# Altium PCB STM32G041.PcbDoc
Units mil, origin at the board's own origin, x right, y up, seen from the top; angles counter-clockwise.
Board outline 2480.31 x 1732.28 mil, 2 copper layers (Top Layer, Bottom Layer); 54 components, 40 nets, 147 pads, 3 vias.
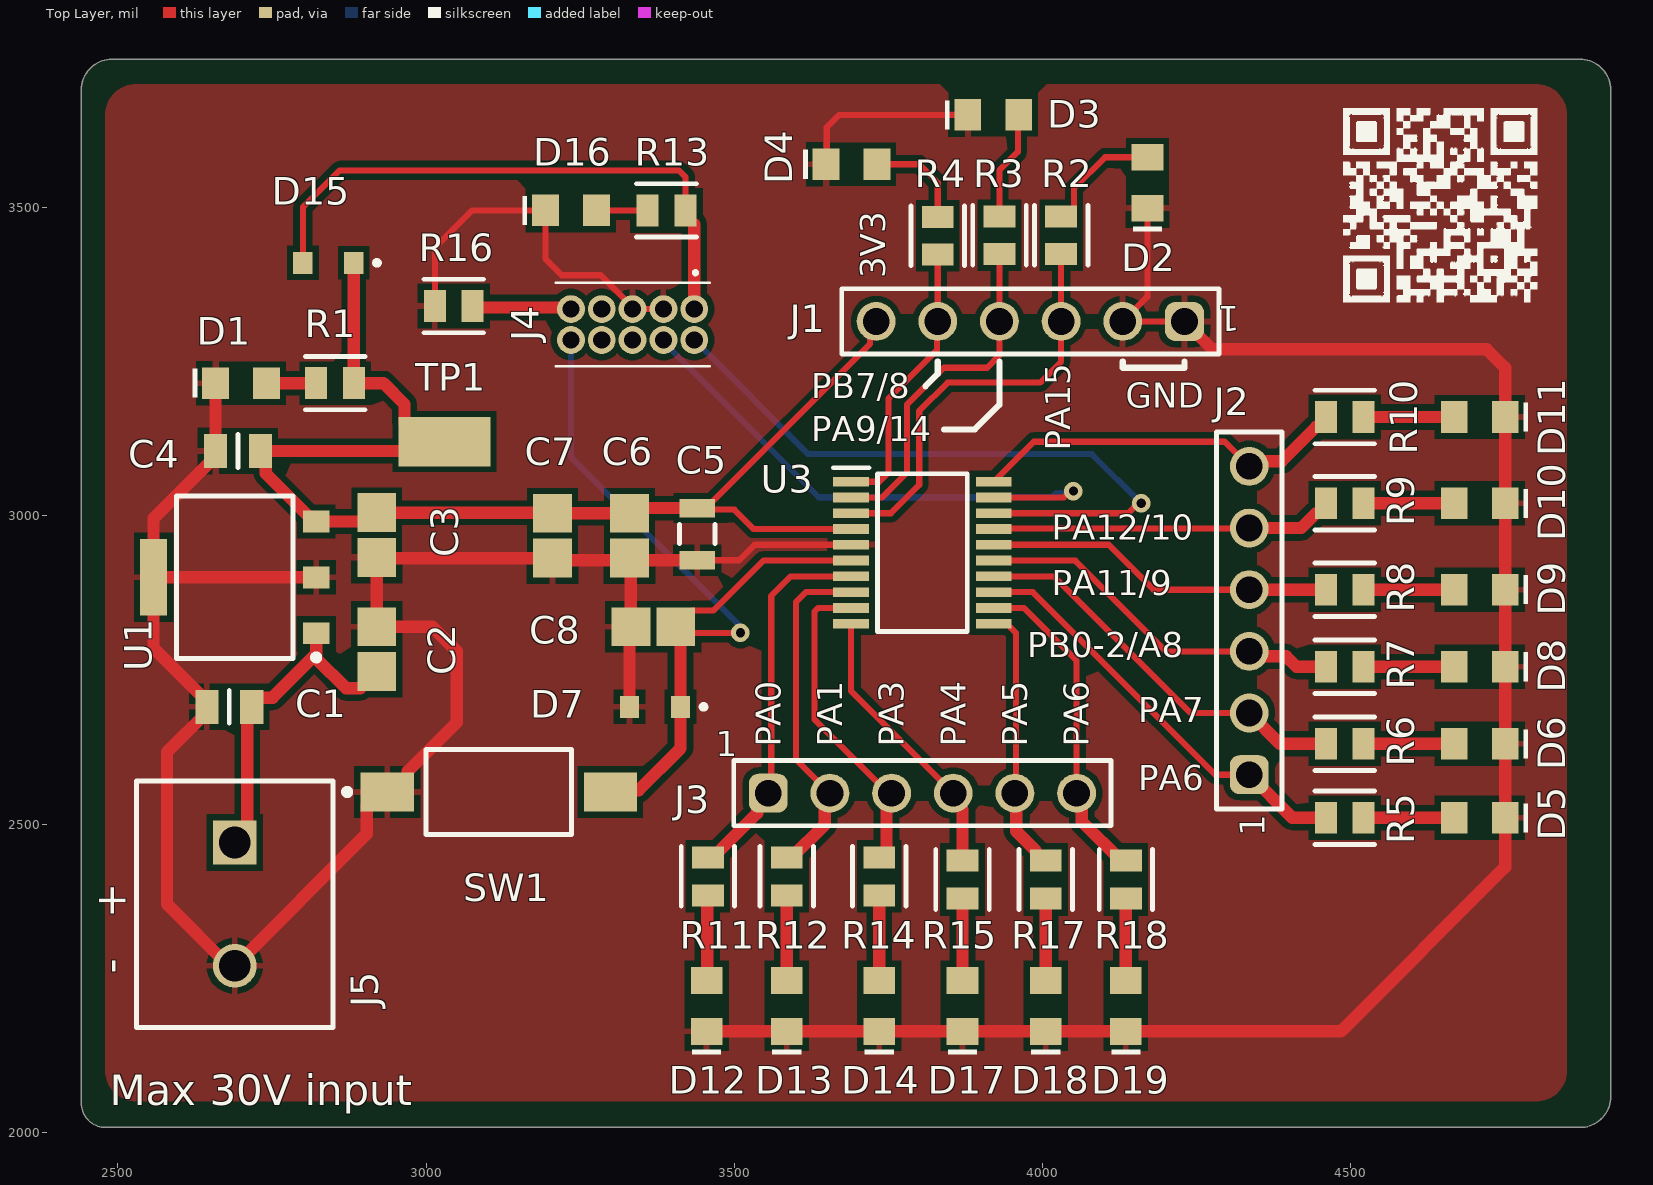
[diagram p0: Top Layer view]
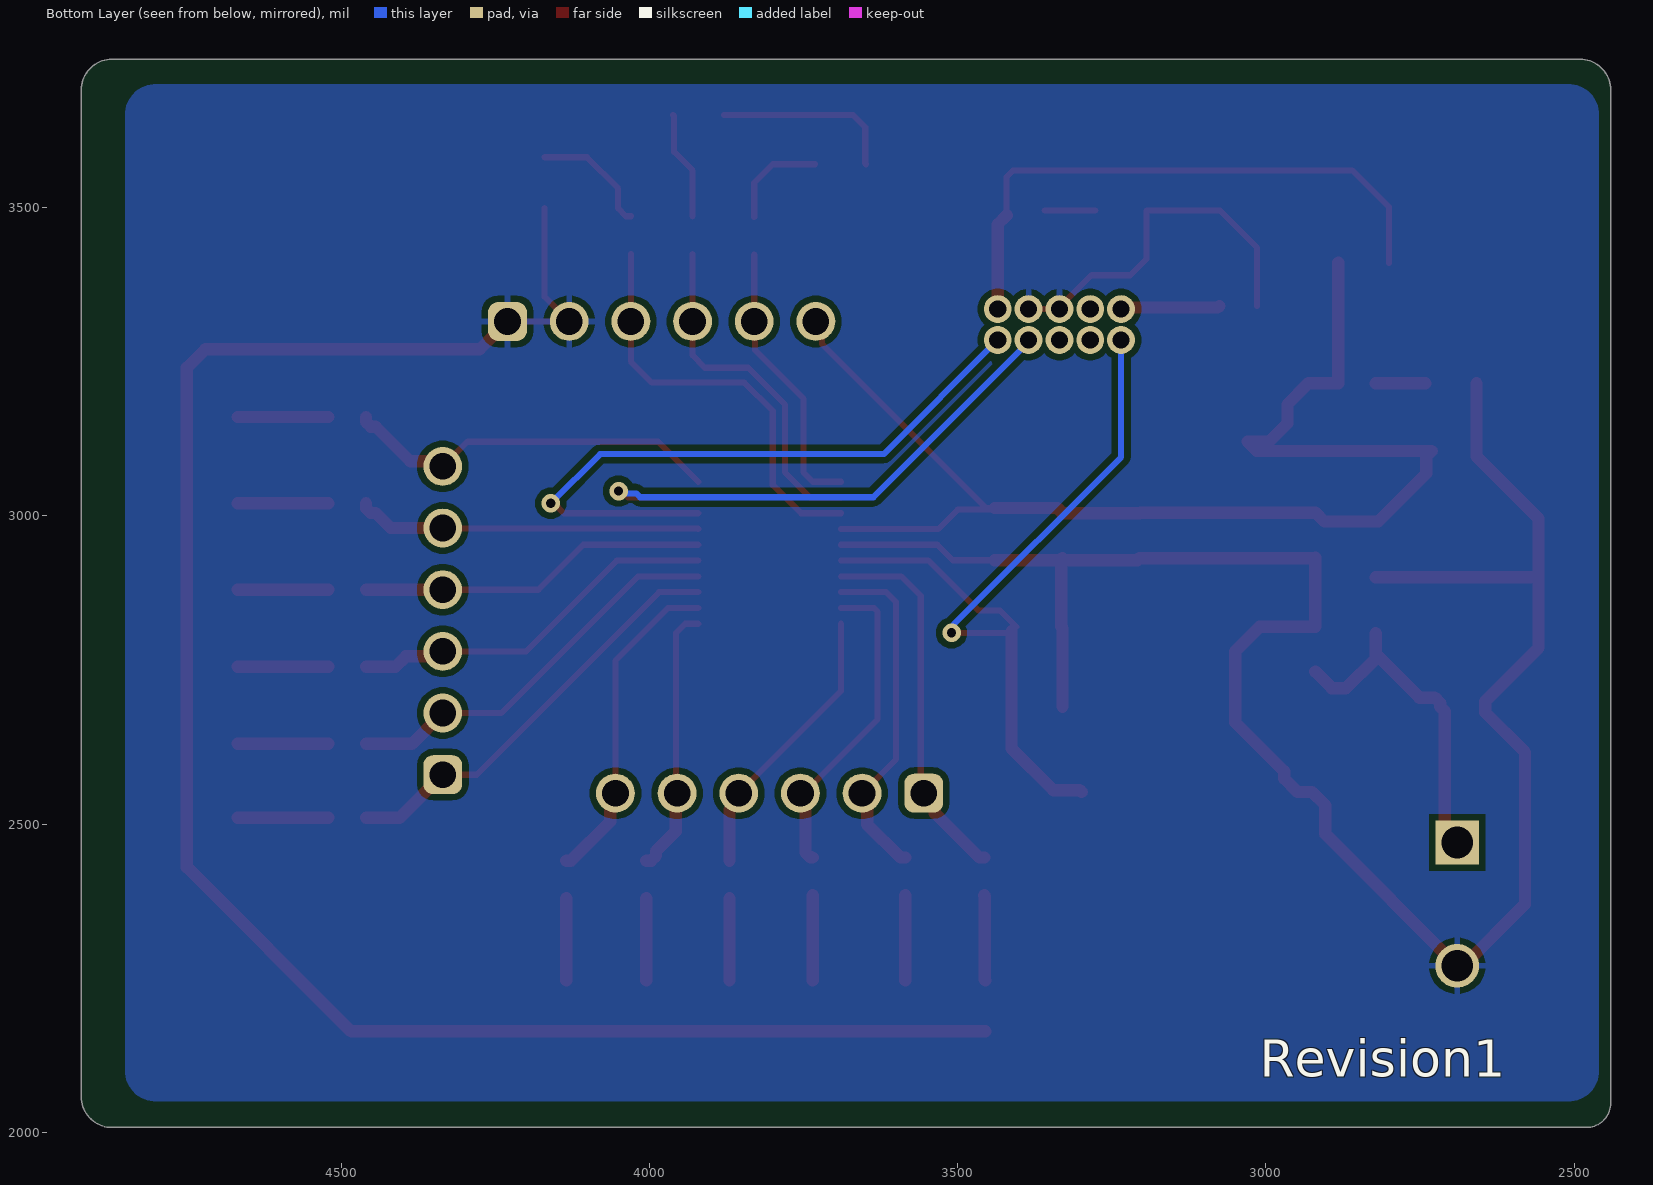
[diagram p1: Bottom Layer view, seen from below]
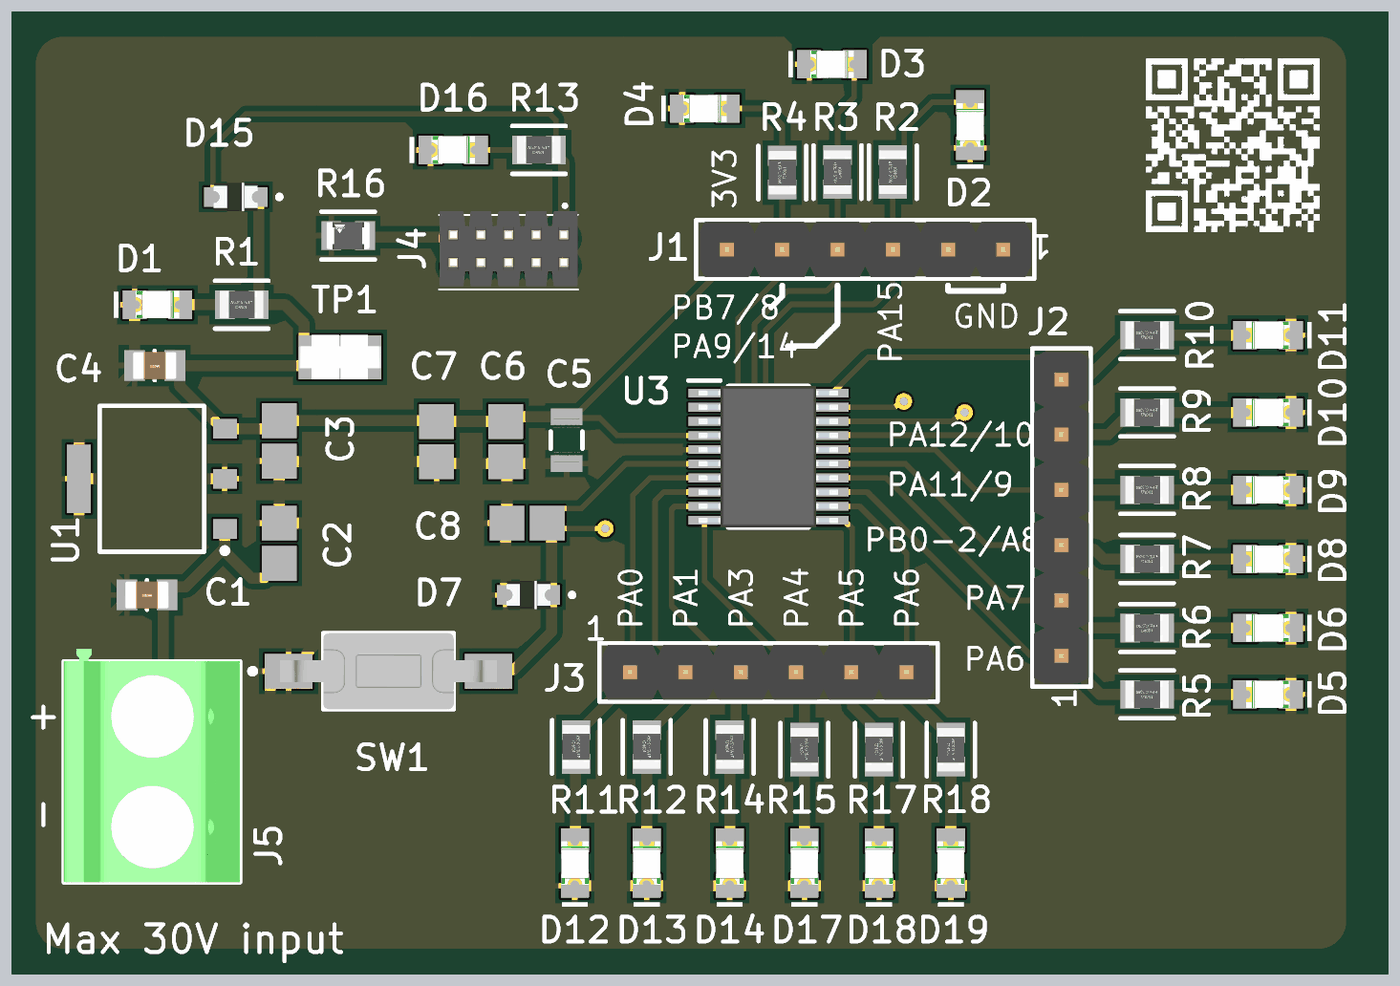
[diagram p2: 3D render of the assembled board from above, using the file's embedded part models]

## Layer stack, top to bottom
Top Solder: solder mask 0.4, Solder Resist, Dk 3.5
Top Layer: signal copper 1.4
Dielectric 1: dielectric 12.6, FR-4, Dk 4.8
Bottom Layer: signal copper 1.4
Bottom Solder: solder mask 0.4, Solder Resist, Dk 3.5

## Board outline
2440.94,2047.24 ccw(c2480.32,2047.24) 2480.32,2007.87 4871.26,2007.87 ccw(c4871.26,2057.87) 4921.26,2057.87 4921.26,3690.16 ccw(c4871.26,3690.16) 4871.26,3740.16 2519.68,3740.16 2490.94,3740.16 ccw(c2490.94,3690.16) 2440.94,3690.16

## Design rules (kind name [scope] priority, off if disabled: settings)
Clearance JTAG_CON [InComponent('J1')] p1: gap=5 ignorepadtopadclearanceinfootprint=FALSE except(2: THPad-THPad)
Clearance [All] p2: gap=5 ignorepadtopadclearanceinfootprint=FALSE except(3: Arc-SMDPad Track-SMDPad)
PolygonConnect [All] p1: connectstyle=Relief reliefconductorwidth=10 reliefentries=4 polygonreliefangle="90 Angle" airgapwidth=10
RoutingVias [All] p1: holewidth=28 width=50 viastyle="Through Hole" minholewidth=28 minwidth=50 maxholewidth=28 maxwidth=50
SolderMaskExpansion [All] p1: expansion=4 istentingtop=FALSE
Width "Schematic Width Constraint" [InNet('+24V')] p1: maxlimit=50 minlimit=20 preferedwidth=35
Width [All] p2: maxlimit=20 minlimit=10 preferedwidth=10
30 further rules are at their usual default settings.

## Components (designator, comment, footprint, x,y, rotation, side; value= is the part's Value field where it differs from the comment)
C1 "CC0805JKX7R9BB105" FP-CC0805-0_2-1_45-MFG 2681,2690 r180 top
C2 "LD051C104KAB2A" CAPC2013X94X50ML25T25 2920,2783.58 r270 top value=0.1uF
C3 "LD051C104KAB2A" CAPC2013X94X50ML25T25 2920,2968.58 r90 top value=0.1uF
C4 "CC0805JKX7R9BB105" FP-CC0805-0_2-1_45-MFG 2695,3105 r180 top
C5 "CGA4J3X7R1C475M125AE" FP-CGA4J-IPC_B 3440,2970 r270 top
C6 "LD051C104KAB2A" CAPC2013X94X50ML25T25 3330,2967.56 r90 top value=0.1uF
C7 "LD051C104KAB2A" CAPC2013X94X50ML25T25 3205,2967.56 r90 top value=0.1uF
C8 "LD051C104KAB2A" CAPC2013X94X50ML25T25 3368.58,2820 r0 top value=0.1uF
D1 "150080GS75000" WL-SMCW_0805_150080xx75000 2700,3215 r0 top
D2 "150080GS75000" WL-SMCW_0805_150080xx75000 4170,3540 r90 top
D3 "150080GS75000" WL-SMCW_0805_150080xx75000 3920,3650 r0 top
D4 "150080GS75000" WL-SMCW_0805_150080xx75000 3690,3570 r0 top
D5 "150080GS75000" WL-SMCW_0805_150080xx75000 4708.66,2510 r180 top
D6 "150080GS75000" WL-SMCW_0805_150080xx75000 4708.66,2630 r180 top
D7 "SD0805S020S1R0" SD0805S020S1R0 3371.34,2690 r180 top
D8 "150080GS75000" WL-SMCW_0805_150080xx75000 4708.66,2755 r180 top
D9 "150080GS75000" WL-SMCW_0805_150080xx75000 4708.66,2880 r180 top
D10 "150080GS75000" WL-SMCW_0805_150080xx75000 4708.66,3020 r180 top
D11 "150080GS75000" WL-SMCW_0805_150080xx75000 4708.66,3160 r180 top
D12 "150080GS75000" WL-SMCW_0805_150080xx75000 3455,2205 r90 top
D13 "150080GS75000" WL-SMCW_0805_150080xx75000 3585,2205 r90 top
D14 "150080GS75000" WL-SMCW_0805_150080xx75000 3735,2205 r90 top
D15 "SD0805S020S1R0" SD0805S020S1R0 2841.66,3410 r180 top
D16 "150080GS75000" WL-SMCW_0805_150080xx75000 3235,3495 r0 top
D17 "150080GS75000" WL-SMCW_0805_150080xx75000 3870,2205 r90 top
D18 "150080GS75000" WL-SMCW_0805_150080xx75000 4005,2205 r90 top
D19 "150080GS75000" WL-SMCW_0805_150080xx75000 4135,2205 r90 top
J1 "61300611121" 61300611121 3980,3315 r180 top
J2 "61300611121" 61300611121 4335,2830 r90 top
J3 "61300611121" 61300611121 3805,2550 r0 top
J4 "FTSH-105-01-F-D-K" FTSH-105-XX-YYY-D-K 3435,3335 r180 top
J5 "1729128" PHOE-1729128-2_V 2690,2370 r270 top
R1 "CRGP0805F120R" FP-CRGP0805-IPC_C 2852.44,3215 r180 top value=120Ω
R2 "CRGP0805F120R" FP-CRGP0805-IPC_C 4030,3455 r270 top value=120Ω
R3 "CRGP0805F120R" FP-CRGP0805-IPC_C 3930,3455 r270 top value=120Ω
R4 "CRGP0805F120R" FP-CRGP0805-IPC_C 3830,3454.04 r270 top value=120Ω
R5 "CRGP0805F120R" FP-CRGP0805-IPC_C 4490,2510 r180 top value=120Ω
R6 "CRGP0805F120R" FP-CRGP0805-IPC_C 4490,2630 r180 top value=120Ω
R7 "CRGP0805F120R" FP-CRGP0805-IPC_C 4490,2755 r180 top value=120Ω
R8 "CRGP0805F120R" FP-CRGP0805-IPC_C 4490,2880 r180 top value=120Ω
R9 "CRGP0805F120R" FP-CRGP0805-IPC_C 4490,3020 r180 top value=120Ω
R10 "CRGP0805F120R" FP-CRGP0805-IPC_C 4490,3160 r180 top value=120Ω
R11 "CRGP0805F120R" FP-CRGP0805-IPC_C 3457.17,2415 r90 top value=120Ω
R12 "CRGP0805F120R" FP-CRGP0805-IPC_C 3585,2415 r90 top value=120Ω
R13 "CRGP0805F120R" FP-CRGP0805-IPC_C 3390,3495 r180 top value=120Ω
R14 "CRGP0805F120R" FP-CRGP0805-IPC_C 3735,2415 r90 top value=120Ω
R15 "CRGP0805F120R" FP-CRGP0805-IPC_C 3870,2410 r90 top value=120Ω
R16 "CRCW0805100RJNEAHP" FP-CRCW0805-HPe3-IPC_C 3045,3340 r0 top
R17 "CRGP0805F120R" FP-CRGP0805-IPC_C 4005,2410 r90 top value=120Ω
R18 "CRGP0805F120R" FP-CRGP0805-IPC_C 4135,2410 r90 top value=120Ω
SW1 "FSMSMTR" TECO-FSMSMTR_V 3118,2552 r0 top
TP1 "5019" KSTN-5019_V 3030,3120 r0 top
U1 "LT1129IST-3.3#TRPBF" LT-ST-3-SOT-223_L 2690,2900 r180 top
U3 "STM32G041F8P6" CLT34BT6 3805,2940 r0 top

## Footprints (in the part's own frame and the unit in brackets; to place one, negate y for a bottom-side part, rotate by r counter-clockwise, add the part's x,y. Pads: shape width x height; smd on the part's side, far side on the other; paste and mask are expansions set on the pad)
61300611121 [mm] "Pin Header, pitch 2.54 mm, THT, Vertical, single row, 6p"
  rrect50% 1.6x1.6 hole 1.1: 1(-6.35,0)
  round 1.6 hole 1.1: 2(-3.81,0) 3(-1.27,0) 4(1.27,0) 5(3.81,0) 6(6.35,0)
  silkscreen extent -7.77,-1.35 7.77,1.35, body extent -7.62,-1.27 7.62,1.27, height 8.57
CAPC2013X94X50ML25T25 [mm] "Chip Capacitor, 2-Leads, Body 2.01x1.25mm, IPC Low Density"
  rect 1.6x1.6 smd: 1(-0.925,0) 2(0.925,0)
  body extent -1.13,-0.75 1.13,0.75, height 0.94
CLT34BT6 [mm]
  rect 1.475x0.4 smd: 1(-2.938,2.925) 2(-2.938,2.275) 3(-2.938,1.625) 4(-2.938,0.975) 5(-2.938,0.325) 6(-2.938,-0.325) 7(-2.938,-0.975) 8(-2.938,-1.625) 9(-2.938,-2.275) 10(-2.938,-2.925) 11(2.938,-2.925) 12(2.938,-2.275) 13(2.938,-1.625) 14(2.938,-0.975) 15(2.938,-0.325) 16(2.938,0.325) 17(2.938,0.975) 18(2.938,1.625) 19(2.938,2.275) 20(2.938,2.925)
  silkscreen extent -3.67,-3.25 1.85,3.5, body extent -3.2,-3.25 3.2,3.25, height 1.2
FP-CC0805-0_2-1_45-MFG [mm]
  rect 0.95x1.4 smd paste+0 mask+0: 1(-0.925,0) 2(0.925,0)
  silkscreen extent 0,-0.67 0,0.67, body extent -1.73,-1.17 1.73,1.17, height 0.25
FP-CGA4J-IPC_B [mm]
  rect 0.756x1.456 smd paste+0 mask+0: 1(-1.075,0) 2(1.075,0)
  silkscreen extent -0.4,-0.73 0.4,0.73, body extent -1.7,-0.98 1.7,0.98, height 0.25
FP-CRCW0805-HPe3-IPC_C [mil]
  rect 35.67x51.5 smd paste+0 mask+0: 1(-30.55,0) 2(30.55,0)
  silkscreen extent -48,-43 48,43, body extent -52,-31 52,31, height 10
FP-CRGP0805-IPC_C [mil]
  rect 35.67x51.57 smd paste+0 mask+0: 1(-30.55,0) 2(30.55,0)
  silkscreen extent -48,-43 48,43, body extent -52,-31 52,31, height 10
FTSH-105-XX-YYY-D-K [mm]
  round 1.15 hole 0.71: 1(0,0) 2(0,1.27) 3(1.27,0) 4(1.27,1.27) 5(2.54,0) 6(2.54,1.27) 7(3.81,0) 8(3.81,1.27) 9(5.08,0) 10(5.08,1.27)
  silkscreen extent -0.64,-1.55 5.71,2.35, body extent -0.64,-1.25 5.71,2.18, height 5.94
KSTN-5019_V [mm] "Test Point, 1-Leads, Body 3.81x2.03mm"
  rect 3.8x2.03 smd: 1(0,0)
  body extent -1.9,-1.01 1.9,1.02, height 2.29
LT-ST-3-SOT-223_L [mm] "SOT223, 4-Leads, Body 6.505x3.505mm, Pitch 2.3mm, IPC High Density"
  rect 1.1x0.9 smd: 1(-3.35,2.3) 2(-3.35,0) 3(-3.35,-2.3)
  rect 1.1x3.15 smd: 4(3.35,0)
  silkscreen extent -3.48,-3.35 2.4,3.42, body extent -1.86,-3.35 1.86,3.35, height 1.8
PHOE-1729128-2_V [mm] "Receptacle, 2-Leads, Body 8.1x10.16mm, Pitch 5.08mm"
  rect 1.8x1.8 hole 1.3: 1(-2.54,0)
  round 1.8 hole 1.3: 2(2.54,0)
  silkscreen extent -5.08,-4.05 5.08,4.05, body extent -5.65,-4.05 5.08,4.05, height 10.01
SD0805S020S1R0 [mm]
  rect 0.8x0.9 smd: 1(-1.05,0) 2(1.05,0)
  silkscreen extent -2.1,-0.1 -1.9,0.1, body extent -1.01,-0.65 1.01,0.65, height 0.8
TECO-FSMSMTR_V [mm] "SMD, 2-Leads, Body 6x3.5mm, Pitch 9.19mm"
  rect 2.2x1.6 smd: 1(-4.595,0)
  rect 2.18x1.6 smd: 2(4.595,0)
  silkscreen extent -6.37,-1.75 3,1.75, body extent -4.98,-1.75 4.98,1.75, height 4.4
WL-SMCW_0805_150080xx75000 [mm] "SMD Mono-color Chip LED, body 2.0x1.25mm"
  rect 1.1x1.3 smd: 1(-1.05,0) 2(1.05,0)
  silkscreen extent -2,-0.6 -1.8,0.6, body extent -1,-0.63 1,0.62, height 0.7

## Part data
C1 C4: library part CMP-03422-001528-1, "CAP CER 1UF 50V X7R 0805", Capacitance=1uF, Case Code (Imperial)=0805, Case Code (Metric)=2012, Max Operating Temperature=125°C, Min Operating Temperature=-55°C, Tolerance=5%, Voltage Rating=50V, Case/Package=0805, Mount="Surface Mount", Packaging="Cut Tape"
C2 C3 C6 C7 C8: library part CMP-2007-04089-1, "CAP CER 0.1UF 100V X7R 0805", Manufacturer="AVX Interconnect / Elco", Part Number=LD051C104KAB2A
C5: library part CMP-08246-001080-1, "Cap Ceramic 4.7uF 16V X7R 20% Pad SMD 0805 +125°C Automotive T/R", Capacitance=4.7uF, Case Code (Imperial)=0805, Case Code (Metric)=2012, Dielectric=X7R, Max Operating Temperature=125°C, Min Operating Temperature=-55°C, Package Quantity=1, Ratings=AEC-Q200, Tolerance=20%, Voltage Rating=16V, Case/Package=0805, Depth=1.25mm, Features="Soft Termination", Height=1.25mm, Length=2mm, Mount="Surface Mount", Packaging="Tape and Reel", REACH SVHC="No SVHC", Termination=SMD/SMT, Thickness=0.049inch, Voltage Rating (DC)=16V, Weight=0.000194oz, Width=0.049inch
D1 D2 D3 D4 D5 D6 D8 D9 D10 D11 D12 D13 D14 D16 D17 D18 D19: library part CMP-1426-00007-2, Case Code (Imperial)=0805, Case Code (Metric)=2012, Color=Green, Forward Current=100mA, Forward Voltage=3.2V, Max Junction Temperature (Tj)=95°C, Max Operating Temperature=85°C, Max Reverse Voltage (DC)=5V, Min Operating Temperature=-40°C, Power Dissipation=105mW, Test Current=20mA, Case/Package=0805, Dominant Wavelength=525nm, Height=700µm, Length=2mm, Lens Style="Clear, Rectangular", Luminous Intensity=450mcd, Mount="Surface Mount", NexarPartId=29717780, Packaging="Tape and Reel", Peak Wavelength=515nm, REACH SVHC=Unknown, Reverse Voltage=5V, RoHS=Compliant, Viewing Angle=140°, Wavelength=520nm, Width=1.25mm
D7 D15: "Schottky Diode", Manufacturer_Name=AVX, Mouser Part Number=581-SD0805S020S1R0, Arrow Part Number=SD0805S020S1R0, Arrow Price/Stock=https://www.arrow.com/en/products/sd0805s020s1r0/avx?region=nac, Datasheet Link=https://componentsearchengine.com/Datasheets/1/SD0805S020S1R0.pdf, Height=1mm, Manufacturer_Part_Number=SD0805S020S1R0, Mouser Price/Stock=https://www.mouser.co.uk/ProductDetail/AVX-Kyocera/SD0805S020S1R0?qs=jCA%252BPfw4LHbpkAoSnwrdjw%3D%3D
J1 J2 J3: library part CMP-1502-01070-2, Color=Black, Contact Resistance=20mΩ, Current Rating=3A, Max Operating Temperature=105°C, Min Operating Temperature=-40°C, Operating Supply Voltage=250V, Connector Type="Male Pin", Contact Gender=Male, Contact Material=Copper, Contact Mating Length=5.9944mm, Contact Plating=Gold, Gender=Male, Height=8.89mm, Housing Material=PBT, Lead Free="Lead Free", Lead Pitch=2.54mm, Mount="Through Hole", NexarPartId=20084590, Number of Contacts=6, Number of Pins=6, Number of Positions=6, Number of Rows=1, Orientation=Vertical, Packaging=Bulk, Pitch=2.54mm, REACH SVHC=Unknown, RoHS=Compliant, Termination="Through Hole", Voltage Rating=250V
J4: "Connector", Manufacturer_Name=SAMTEC, Mouser Part Number=200-FTSH10501FDK, Arrow Part Number=FTSH-105-01-F-D-K, Arrow Price/Stock=https://www.arrow.com/en/products/ftsh-105-01-f-d-k/samtec?region=europe, Datasheet Link=http://suddendocs.samtec.com/prints/ftsh-1xx-xx-xxx-d-xxx-xx-mkt.pdf, Manufacturer_Part_Number=FTSH-105-01-F-D-K, Mouser Price/Stock=https://www.mouser.co.uk/ProductDetail/Samtec/FTSH-105-01-F-D-K?qs=FESYatJ8odIwRE%252Bc%2FZcQYA%3D%3D
J5: library part CMP-2000-05815-1, "PCB Terminal Block, 13.5 A, 400 V, 2-Pin THD, RoHS, Bulk", Current Rating=13500mA, Manufacturer="Phoenix Contact", Package Description="2-Pin Through Hole Device, Body 8.1 x 10.16 mm, Pitch 5.08 mm", Package Reference=1729128-2, Package Version=03/2015, Voltage Rating=400V, Datasheet URL=https://datasheet.ciiva.com/16046/1729128-16046181.pdf, Datasheet Version=12/2013, Manufacturer URL=http://www.phoenixcontact.com/, Mounting Technology=ThroughHole, No. of Positions=2, No. of Rows=1, Orientation=Horizontal, Package URL=https://www.phoenixcontact.com/online/portal/pi/pxc/product_detail_page/!ut/p/b1/3VdJjqNKFDxLH8AFycySyWY2ozFsEPOMMQaDOX1XedGL_1Vdm5YXJleknhSKeBkvI6EA8ncAo3AYoDhBQGco6KN7VURTdemj9us_IEKEZo_YHiPAEWEFmDGOHMORkqKYCORBZxgL7ZoaZYcbFFUZ3fqxSY6GOuxydWUuHqz1ynmMFygu583Bob0Ewr6Sd_l-5m-kAueHiB0jpRwZwe58wwtkpxtMYd_LmGcDRU02dRNEyWt6Y2ti5pSyJ_reIkzIulrqApdnbT11V5jnCKbYNCvhEM1MCpPByat_X379-iThf08CI5GfOPqfBeS3BRoBOdD55AKVv0iLwCMq-2BrzXWSGRH7pUGD9uwXQjiph3xL0DKQwdGa0JImiIOmBNOestqgwTHSSs2oOep-78apyXQBvNi8ZLaFjvjWvcaUEBu0MC6Wbe-d6mB0FAebo2lUWinqYaZs5DAYzV0RP9yitUjnGJ0iI9xhZkT42OCQNUJJhkgWINNQLP2JFP6OpMg3JCVg70jqHT0lvKOnhHf0lPuOnnLf0VPuWx6_dxwUIvwk5WMkT0kLL1mh61l2yZVSzG3pYV_bqo-mj6uMKwKwdnnW8Jh5RTOJzMOA5c-eJDaZQw4mTMPH02PvS_ZAqNVjVTo2WyYLkwH_KU1mmmG5kjRhDqPXLwwVHvVOjCM60-fpXvTDfMGW1PVFVS1r4e4yVDk4ZdNbkUHvqPqQSeian4UD39fNKmachqdJ1NJbyk8rXT9mXTvPk3oE5meulKGgiruPJek-4I9hTT6G8ZLOyRSm2RRVbThERQad5OS28hdt4YW4vG0stgYYzsWsK4_7y6DZMjJSCqri1kyiZR5vD7pwIrNR7QwPHTcLTI5qT7eRlpHrdGiupYlqQDJ7zy_CND8fWWBoLRXxk1RVcXiBQwbTD4Xi7KL-FuO94t9xaqweXzH, Packing=Bulk, PartNumber=1729128, Pitch=5.08mm, RoHS=TRUE
R1 R2 R3 R4 R5 R6 R7 R8 R9 R10 R11 R12 R13 R14 R15 R17 R18: library part CMP-03211-003086-1, "CRGP0805 120Ω 0.33W ±100ppm/°C 1% 150V", Ambient Temperature Range High=+70°C, Manufacturer=TE, Package=CRGP0805, Power Rating=0.33W, Resistance=120Ω, Temperature="-55°C to +155°C", Temperature Coefficient=±100ppm/°C, Temperature Range High=+155°C, Temperature Range Low=-55°C, Tolerance=0.01, Voltage Rating=150V, Automotive=No, Category=Res, ComponentLink2Description=Datasheet, ComponentLink2URL=https://www.mouser.com/datasheet/2/418/NG_DS_9-1773463-9_A-1358566.pdf, Composition="Thick Film", Device Class L1="Passive Components", Device Class L2=Resistors, Device Class L3="Chip SMD Resistors", Height=0.65mm, Ipc Land Pattern Name=RESC200125X55, Lead Free=Yes, Manufacturer Part Number=CRGP0805F120R, Octopart=https://octopart.com/crgp0805f120r-te+connectivity-91018785, RoHS=TRUE, Series=CRGP
R16: library part CMP-02407-002130-1, "RES Thick Film, 100Ω, 5%, 0.5W, 200ppm/°C, 0805", Case Code (Imperial)=0805, Case Code (Metric)=2012, Max Operating Temperature=155°C, Max Power Dissipation=333mW, Min Operating Temperature=-55°C, Package Quantity=1, Power Rating=330mW, Resistance=100R, Temperature Coefficient=200ppm/°C, Tolerance=5%, Voltage Rating=150V, Case/Package=0805, Composition="Thick Film", Contact Plating=Tin, Features="Automotive AEC-Q200", Height=0.024inch, Lead Free="Lead Free", Length=0.079inch, Number of Terminations=2, Packaging="Tape and Reel", Radiation Hardening=No, Termination=SMD/SMT, Weight=0.000194oz, Width=0.049inch
SW1: library part CMP-2000-07501-1, "FSMSM Push Button Switch, 50 mA, -35 to 85 degC, 2-Pin SMD, RoHS, Tape and Reel", Case\/Package=SMD/SMT, Contact Current Rating=50mA, Contact Resistance=100mOhm, Manufacturer="TE Connectivity", Max Operating Temperature=85degC, Max Voltage Rating (DC)=12V, Min Operating Temperature=-35degC, Operating Force=180gf, Package Description="2-Pin Surface Mount Device, Body 6 x 3.5 mm, Pitch 9.19 mm", Package Quantity=1800, Voltage Rating (DC)=24V, Actuator Length=1.07mm, Actuator Material=Polyamide, Contact Material=Brass, Contact Plating=Silver, Current Rating=50mA, Datasheet URL=http://www.te.com/commerce/DocumentDelivery/DDEController?Action=showdoc&DocId=Customer+Drawing%7F1437566-3%7FC2%7Fpdf%7FEnglish%7FENG_CD_1437566-3_C2_1437566_3_1_c.dwg.pdf%7F1437566-4, Datasheet Version="Rev. C2, 08/2014", Electrical Life=20000Cycles, ELV=Compliant, Illumination Type=Illuminated, Lead Free=LeadFree, Manufacturer URL=http://www.te.com/, Mechanical Life=20000Cycles, Mount=SurfaceMount, Mounting Technology=SurfaceMount, Orientation=Straight, Package Reference=FSMSMTR, Packaging=TapeandReel, REACH SVHC=Unknown, RoHSCompliant=true, Switch Travel=0.25mm, Termination=GullWing, Throw Configuration=SPST
TP1: library part CMP-1672-00008-1, "Test Point, 1 Position SMD, RoHS, Tape and Reel", Package Quantity=1000, ComponentLink1Description="Manufacturer URL", ComponentLink1URL=http://www.keyelco.com/, ComponentLink2Description=Datasheet, ComponentLink2URL=http://www.keyelco.com/product-pdf.cfm?p=1357, Contact Plating=Silver, DatasheetVersion=03/2014, Mount="Surface Mount", Mounting Technology="Surface Mount", PackageDescription="1-Pin Surface Mount Device, Body 3.81 x 2.03 mm", PackageReference=5019, Packaging="Tape and Reel", Pins=1, RoHSCompliant=True
U1: library part CMP-0476-01829-1, "Micropower Low Dropout Regulator with Shutdown, 4.15 to 30 V Vin, 3.3 V Vout, 3-pin SOT223 (ST-3), -40 to 125 degC, Pb-Free, Tape and Reel", Dropout Voltage(V)=0.45, Manufacturer="Linear Technology", Output Voltage="3.3 V", Shutdown Current(uA)=16, ComponentLink1Description="Manufacturer URL", ComponentLink1URL=http://www.linear.com/, ComponentLink2Description=Datasheet, ComponentLink2URL=http://cds.linear.com/docs/en/datasheet/112935ff.pdf, ComponentLink3Description="Package Specification", ComponentLink3URL=http://cds.linear.com/docs/en/packaging/SOT_3_05-08-1630.pdf, DatasheetVersion="Rev. F", Discrete Pass Element=no, Iout(mA)=700, Isupply(mA)=0.05, Mounting Technology="Surface Mount", Number of Outputs=1, PackageDescription="3-Pin Plastic SOT-223, 3.505 x 6.505 mm Body, Pitch 2.3 mm", PackageReference=ST-3, PackageVersion=Jun-10, Packing="Tape and Reel", PartNumber=LT1129IST-3.3#TRPBF, PSRR(dB)=64, RoHS=TRUE, Vin Max(V)=30, Vin Min(V)=4.15
U3: "Integrated Circuit", Manufacturer_Name=STMicroelectronics, Mouser Part Number=511-STM32G041F8P6, Datasheet Link=https://www.st.com/resource/en/datasheet/stm32g041c6.pdf, Height=1.2mm, Manufacturer_Part_Number=STM32G041F8P6, Mouser Price/Stock=https://www.mouser.co.uk/ProductDetail/STMicroelectronics/STM32G041F8P6?qs=xZ%2FP%252Ba9zWqayYoZl7%2Ff%252BOA%3D%3D

## Via types
v1: diameter 30, hole 15, Top Layer to Bottom Layer, 3 vias

## Nets (pads, with @x,y where several pads share a name; then routed paths per layer and width w, separated by ;. In a path a pad name is that pad's centre, name@x,y a point inside that pad or via, vN(x,y) a via of type N, cw(c..) or ccw(c..) an arc to the next point about the centre after c; other vN are vias at no path point)
3V3: C3.2 C4.1 C5.1 C6.2 C7.2 D15.1 J1.6 R1.1 TP1.1 U1.3 U3.4 | length 2180.6
  Top Layer w10: U3.4 3531.61,2978.39 3500,3010 3442.32,3010 C5.1 3453.78,3012.32 3719.86,3278.4 3719.86,3304.86 J1.6
  Top Layer w20: D15.1 R1.1 2930.83,3215 2965.2,3180.64 2965.2,3149.96 2995.16,3120 TP1.1 3015,3105 C4.1 2740.12,3096.3 2740.12,3068.39 2817.95,2990.55 U1.3 2905.55,2990.55 C3.2 3203.98,3005 C7.2 C6.2 3338.35,3012.32 C5.1
+24V: C1.1 C2.2 J5.1 U1.1 | length 552.8
  Top Layer w20: J5.1@2680.09,2454.91 J5.1@2690,2445 ; J5.1 2710,2490 2710,2682.58 C1.1 ; C1.1@2717.42,2696.2 2726.12,2704.9 2751.2,2704.9 2821.89,2775.59 ; U1.1 2821.89,2782.52 2821.89,2775.59 ; C2.2 2893.17,2720.33 2870.22,2720.33 2821.89,2768.66 2821.89,2775.59
GND: C1.2 C2.1 C3.1 C4.2 C5.2 C6.1 C7.1 C8.1 D1.1 D2.1 D3.1 D4.1 D5.1 D6.1 D7.2 D8.1 D9.1 D10.1 D11.1 D12.1 D13.1 D14.1 D16.1 D17.1 D18.1 D19.1 J1.1 J1.2 J4.3 J4.5 J5.2 R16.1 SW1.1 U1.2 U1.4 U3.5 | length 7289.1
  Top Layer w10: R16.1 3014.45,3434.45 3075,3495 D16.1 3193.66,3416.34 3220,3390 3283.23,3390 3335,3338.23 J4.5 J4.3 ; C5.2 3507.68,2927.68 3532.8,2952.8 U3.5 ; D4.1 3650,3571.34 3650,3630 3670,3650 D3.1 ; D2.1 4170,3355 J1.2 J1.1
  Top Layer w20: D1.1 2658.62,3214.96 2658.62,3096.18 2558.11,2995.67 U1.4 ; U1.2 U1.4 ; D7.2 3330,2817.83 C8.1 C6.1@3332.17,2927.68 ; C6.1 3332.17,2928.98 C6.1@3332.17,2927.68 ; C5.2 C6.1@3332.17,2927.68 ; D12.1 D13.1 D14.1 D17.1 D18.1 D19.1 4483.66,2163.66 4750,2430 D5.1 D6.1 D8.1 D9.1 D10.1 D11.1 4750,3240 4720,3270 4275,3270 J1.1 ; U1.4 2558.11,2785.33 2644.58,2698.86 C1.2 2644.58,2681.14 2580,2616.56 2580,2370 2680,2270 J5.2 2903.79,2483.79 2903.79,2530.5 2925.28,2552 SW1.1 2948.91,2552 2970.4,2573.5 2970.4,2585.31 3050,2664.91 3050,2780 3010,2820 C2.1 C3.1 2921.02,2931.14 C7.1 3208.46,2927.68 C6.1@3332.17,2927.68
GND_Detect: J4.9 R16.2 | length 161.5
  Top Layer w20: R16.2 3078.05,3337.5 3232.5,3337.5 J4.9
NetD1_2: D1.2 R1.2 | length 80.6
  Top Layer w20: D1.2 R1.2
NetD2_2: D2.2 R2.1 | length 198.7
  Top Layer w10: R2.1 4037.95,3485.55 4050.78,3498.39 4050.78,3530.78 4101.34,3581.34 D2.2
NetD3_2: D3.2 R3.1 | length 177.4
  Top Layer w10: R3.1 3930,3560 3960,3590 3960,3648.66 D3.2
NetD4_2: D4.2 R4.1 | length 166.5
  Top Layer w10: D4.2 3800,3570 3830,3540 R4.1
NetD5_2: D5.2 R5.1 | length 146.8
  Top Layer w20: R5.1 D5.2
NetD6_2: D6.2 R6.1 | length 146.8
  Top Layer w20: R6.1 D6.2
NetD8_2: D8.2 R7.1 | length 146.8
  Top Layer w20: R7.1 D8.2
NetD9_2: D9.2 R8.1 | length 146.8
  Top Layer w20: R8.1 D9.2
NetD10_2: D10.2 R9.1 | length 146.8
  Top Layer w20: R9.1 D10.2
NetD11_2: D11.2 R10.1 | length 146.8
  Top Layer w20: R10.1 D11.2
NetD12_2: D12.2 R11.1 | length 139
  Top Layer w20: D12.2 3456.08,2247.42 3456.08,2383.36 R11.1
NetD13_2: D13.2 R12.1 | length 138.1
  Top Layer w20: D13.2 R12.1
NetD14_2: D14.2 R14.1 | length 138.1
  Top Layer w20: D14.2 R14.1
NetD16_2: D16.2 R13.2 | length 83.1
  Top Layer w10: D16.2 R13.2
NetD17_2: D17.2 R15.1 | length 133.1
  Top Layer w20: D17.2 R15.1
NetD18_2: D18.2 R17.1 | length 133.1
  Top Layer w20: D18.2 R17.1
NetD19_2: D19.2 R18.1 | length 133.1
  Top Layer w20: D19.2 R18.1
NRST: C8.2 D7.1 J4.10 SW1.2 U3.6 | length 1359.5
  Top Layer w10: v1(3510,2810) 3415,2810 3412.68,2812.32 C8.2 3431.5,2846.5 3466.5,2846.5 3547.2,2927.2 U3.6
  Top Layer w20: SW1.2 3301.91,2555 3345,2555 3412.68,2622.68 D7.1 C8.2@3412.68,2812.32
  Bottom Layer w10: J4.10 3235,3095 3506.17,2823.83 3506.17,2813.83 v1(3510,2810)
PA0: J3.1 R11.2 U3.7 | length 614.1
  Top Layer w10: J3.1 3560,2555 3560,2870 3591.61,2901.61 U3.7
  Top Layer w20: R11.2 3465.11,2445.55 3537.05,2517.49 3537.05,2532.05 J3.1
PA1: J3.2 R12.2 U3.8 | length 566.8
  Top Layer w10: J3.2 3600,2605 3600,2860 3616.02,2876.02 U3.8
  Top Layer w20: R12.2 3592.95,2445.55 3646.77,2499.38 3646.77,2541.77 J3.2
PA2: J3.3 R14.2 U3.9 | length 526.1
  Top Layer w10: U3.9 3635.86,2850.43 3630,2844.58 3630,2670 3750,2550 J3.3
  Top Layer w20: R14.2 3738.94,2445.55 3746.77,2453.39 3746.77,2541.77 J3.3
PA3: J3.4 R15.2 U3.10 | length 459.1
  Top Layer w10: U3.10 3689.33,2715.67 J3.4
  Top Layer w20: J3.4 3855,2538.37 3870,2523.37 R15.2
PA4: J3.5 R17.2 U3.11 | length 437.7
  Top Layer w10: U3.11 3941.83,2824.84 3956.67,2810 3956.67,2551.67 J3.5
  Top Layer w20: J3.5 3957.05,2547.95 3957.05,2488.5 3989.22,2456.34 3989.22,2448.39 3997.05,2440.55 R17.2
PA5: J3.6 R18.2 U3.12 | length 532
  Top Layer w10: U3.12 3969.57,2850.43 4055,2765 J3.6
  Top Layer w20: J3.6 4063.23,2541.77 4063.23,2504.38 4127.05,2440.55 R18.2
PA6: J2.1 R5.2 U3.13 | length 690.4
  Top Layer w10: U3.13 3983.98,2876.02 4280,2580 J2.1
  Top Layer w20: J2.1 4405,2510 R5.2
PA7: J2.2 R6.2 U3.14 | length 651.3
  Top Layer w10: U3.14 4018.39,2901.61 4240,2680 J2.2
  Top Layer w20: J2.2 4385,2630 R6.2
PA11: J2.4 R8.2 U3.16 | length 568.9
  Top Layer w10: U3.16 4107.2,2952.8 4180,2880 J2.4
  Top Layer w20: J2.4 R8.2
PA12: J2.5 R9.2 U3.17 | length 560.7
  Top Layer w10: U3.17 3921.48,2979.19 4334.19,2979.19 J2.5
  Top Layer w20: J2.5 4419.45,2980 4443.66,3004.22 4451.61,3004.22 4459.45,3012.05 R9.2
PB0: J2.3 R7.2 U3.15 | length 610.1
  Top Layer w10: U3.15 4052.8,2927.2 4200,2780 J2.3
  Top Layer w20: J2.3 4343.23,2771.77 4394.84,2771.77 4411.61,2755 R7.2
PB3: J2.6 R10.2 U3.20 | length 620
  Top Layer w10: U3.20 3985.51,3120 4295,3120 J2.6
  Top Layer w20: J2.6 4343.23,3088.23 4387.67,3088.23 4443.66,3144.22 4451.61,3144.22 4459.45,3152.05 R10.2
PB7: J1.5 R4.2 U3.1 | length 453.4
  Top Layer w10: U3.1 3735.16,3055.16 3750,3070 3750,3190 3828.5,3268.5 3828.5,3313.5 J1.5 R4.2
PB9: J1.4 R3.2 U3.2 | length 565
  Top Layer w10: U3.2 3739.57,3029.57 3780,3070 3780,3180 3840,3240 3910,3240 3930,3260 J1.4 R3.2
PC15: J1.3 R2.2 U3.3 | length 687.3
  Top Layer w10: U3.3 3753.98,3003.98 3800,3050 3800,3170 3845.86,3215.86 3995.86,3215.86 4030,3250 J1.3 R2.2
SWCLK: J4.4 U3.19 | length 910.3
  Top Layer w10: U3.19 4034.15,3029.57 4044.59,3040 v1(4050,3040)
  Bottom Layer w10: J4.4 3385,3281.77 3636.77,3030 4015,3030 4021.17,3036.17 4046.17,3036.17 v1(4050,3040)
SWDIO: J4.2 U3.18 | length 1080.7
  Top Layer w10: U3.18 4138.56,3003.98 4154.59,3020 v1(4160,3020)
  Bottom Layer w10: J4.2 3620,3100 4080,3100 v1(4160,3020)
T_VCC: D15.2 J4.1 R13.1 | length 960.1
  Top Layer w10: D15.2 2800.32,3500.32 2860,3560 3410,3560 3420.55,3549.45 R13.1 R13.1@3420.55,3487.05
  Top Layer w20: R13.1@3420.55,3487.05 3435,3472.61 J4.1
pads on no net: J4.6 J4.7 J4.8

## Polygon pours and split planes (outlines as drawn)
GND on Bottom Layer "GND_L02_P000" (solid, remove dead copper, pour order 0): 2510,3700 ccw(c2510,3650) 2460,3650 2460,2100 ccw(c2510,2100) 2510,2050 4800,2050 ccw(c4800,2100) 4850,2100 4850,3650 ccw(c4800,3650) 4800,3700
GND on Top Layer "GND_L01_P001" (solid, remove dead copper, pour order 1): 2530,3700 ccw(c2530,3650) 2480,3650 2480,2100 ccw(c2530,2100) 2530,2050 4800,2050 ccw(c4800,2100) 4850,2100 4850,3650 ccw(c4800,3650) 4800,3700

## Silkscreen, mask and mechanical layers (free items; w line width, h text height)
Top Overlay:
  drawing of 66 lines, arcs and shapes, not listed
  text "3V3" at 3745,3385 h40 r90
  text "PB7/8" at 3625,3190.71 h40
  text "GND" at 4135,3175 h40
  text "PA9/14" at 3625,3120.71 h40
  text "PA15" at 4045,3105 h40 r90
  text "PA12/10" at 4015,2960.71 h40
  text "PA11/9" at 4015,2870.71 h40
  text "PB0-2/A8" at 3975,2770.71 h40
  text "PA7" at 4155,2665 h40
  text "PA0" at 3575,2625 h40 r90
  text "PA1" at 3675,2625 h40 r90
  text "PA3" at 3775,2625 h40 r90
  text "PA4" at 3875,2625 h40 r90
  text "PA5" at 3975,2625 h40 r90
  text "PA6" at 4075,2625 h40 r90
  text "PA6" at 4155,2555 h40
  text "-   +" at 2513,2257 h50 r90
  text "Max 30V input" at 2487,2043.66 h50
Bottom Overlay:
  text "Revision1" at 3010,2090 h60
Board Shape:
  the board outline again, w10

## Dimensions
4871.26,3740.16 to 2480.32,2007.87 on Dimensions
2440.94,3690.16 to 4921.26,3690.16 on Dimensions

## Text inside footprints (layer, text, board x,y; h text height)
J1: Top Overlay "1" at 4320,3340 h40 r180
J2: Top Overlay "1" at 4360,2480 h40 r90
J3: Top Overlay "1" at 3470,2610 h40